# EAGLE board LTC6240CS8PBF_breakout (EAGLE 8.5.1)
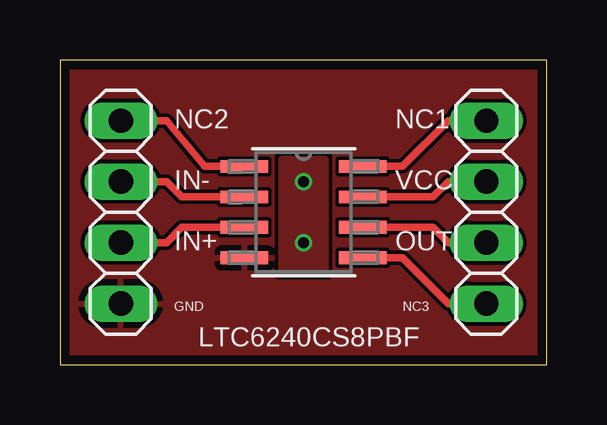
[diagram p0: board, top side]
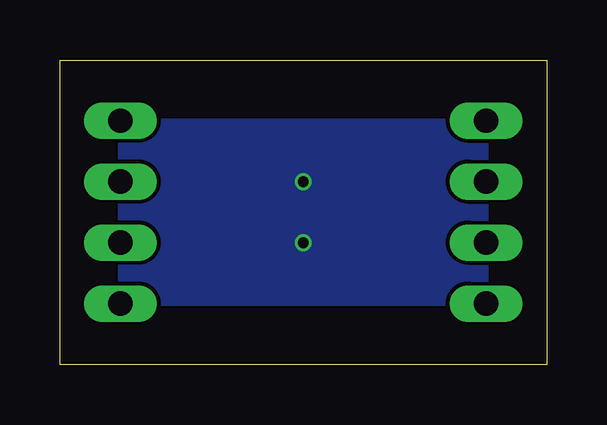
[diagram p1: board, bottom side, seen from below]

Size 20.31 x 12.69 mm. Coordinates in mm from the lower left corner, seen from the top.
Outline: 0,0 20.31,0 20.31,12.69 0,12.69 0,0
Copper layers (1*16): Top 0.035559375mm / dielectric 1.6mm / Bottom 0.035559375mm
Design rules "oshpark-2layer": minimum track width 6mil, minimum drill 10mil, track to track 6mil, track to pad 6mil, pad to pad 6mil, via to via 6mil, smd to smd 6mil, copper to edge 15mil, drill to drill 6mil, minimum pad ring 5mil, minimum via ring 5mil, stop-mask expansion 2.5mil, vias tented up to drill 0mil, thermal gap 10mil

## Footprints (pad centres in the part's own frame; a part is rotated, then mirrored left to right if it is on the bottom)
1X04 = drill 1.016 long: 1 -3.81,0; 2 -1.27,0; 3 1.27,0; 4 3.81,0
SO-8_S = smd 1.981 x 0.533: 1 -2.464,1.905; 2 -2.464,0.635; 3 -2.464,-0.635; 4 -2.464,-1.905; 5 2.464,-1.905; 6 2.464,-0.635; 7 2.464,0.635; 8 2.464,1.905

## Placement (x,y rotation side)
JP1  [1X04]  2.54,6.35 90 top
JP2  [1X04]  17.78,6.35 270 top
U1  LTC6240CS8PBF  [SO-8_S]  10.16,6.35 0 top

## Library data of the parts
JP1 JP2 = pinhead
U1 = LTC6240CS8PBF; AVAILABILITY: Good; DESCRIPTION: LTC6240 Op Amp CMOS R-R SOICN-8; MF: Linear Technology; MP: LTC6240CS8#PBF; PACKAGE: SOIC-8 Linear Technology; PRICE: 1.20 USD

## Nets
GND: JP1.1 U1.4
IN+: JP1.2 U1.3
IN-: JP1.3 U1.2
NC1: JP2.1 U1.8
NC2: JP1.4 U1.1
NC3: JP2.4 U1.5
OUT: JP2.3 U1.6
VCC: JP2.2 U1.7

## Tracks (layer width: path | path; a pad name or v marks a point on that pad's centre or on a via)
GND
  pour Top (rank 2): 0,0 0,12.7 20.32,12.7 20.32,0
HEAT  (via drill 0.45)
  other vias: 10.16,7.62 10.16,5.08
  pour Top: 9.21,8.57 9.21,3.81 11.11,3.81 11.11,8.57
  pour Bottom: 2.54,2.54 17.78,2.54 17.78,10.16 2.54,10.16
IN+
  Top 0.305: U1.3 5.08,5.71 4.45,5.08 JP1.2
IN-
  Top 0.305: U1.2 5.08,6.99 4.45,7.62 JP1.3
NC1
  Top 0.305: U1.8 14.29,8.26 16.19,10.16 JP2.1
NC2
  Top 0.305: U1.1 6.03,8.26 4.45,10.16 JP1.4
NC3
  Top 0.305: U1.5 14.29,4.45 16.19,2.54 JP2.4
OUT
  Top 0.305: U1.6 15.56,5.71 16.19,5.08 JP2.3
VCC
  Top 0.305: U1.7 15.56,6.99 16.19,7.62 JP2.2

## Text on the board
tPlace: NC2 | NC1 | IN- | VCC | IN+ | OUT | GND | NC3